# EAGLE board TeensyBalanceBoardSignalsRouted (EAGLE 7.7.0)
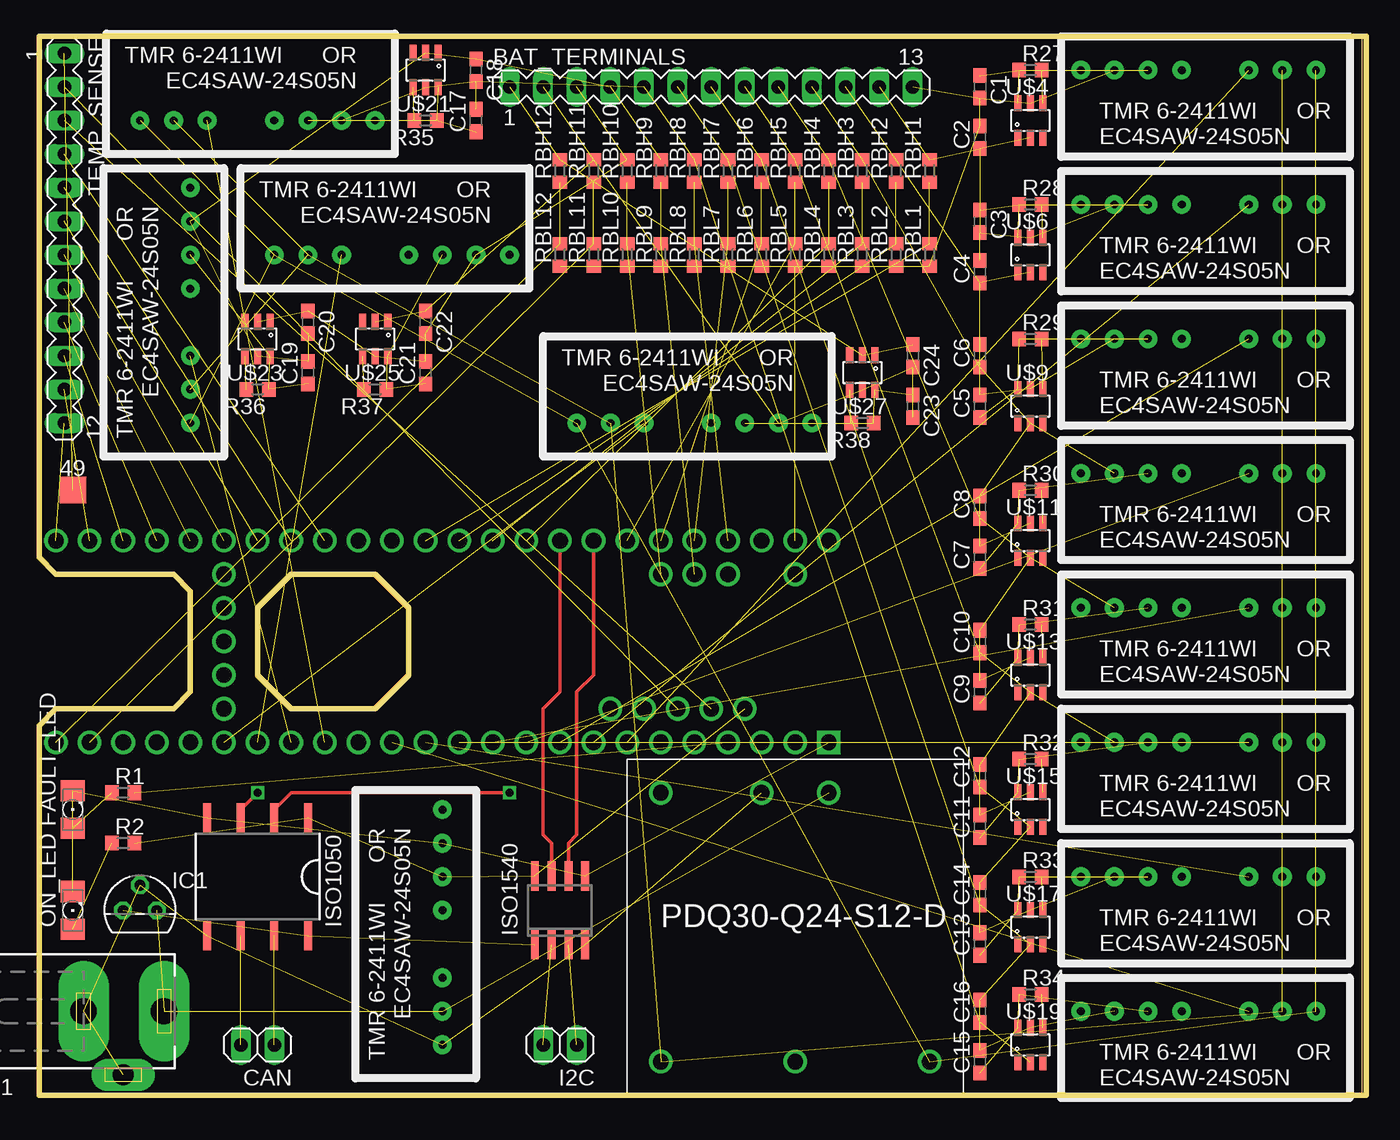
[diagram p0: board, top side]
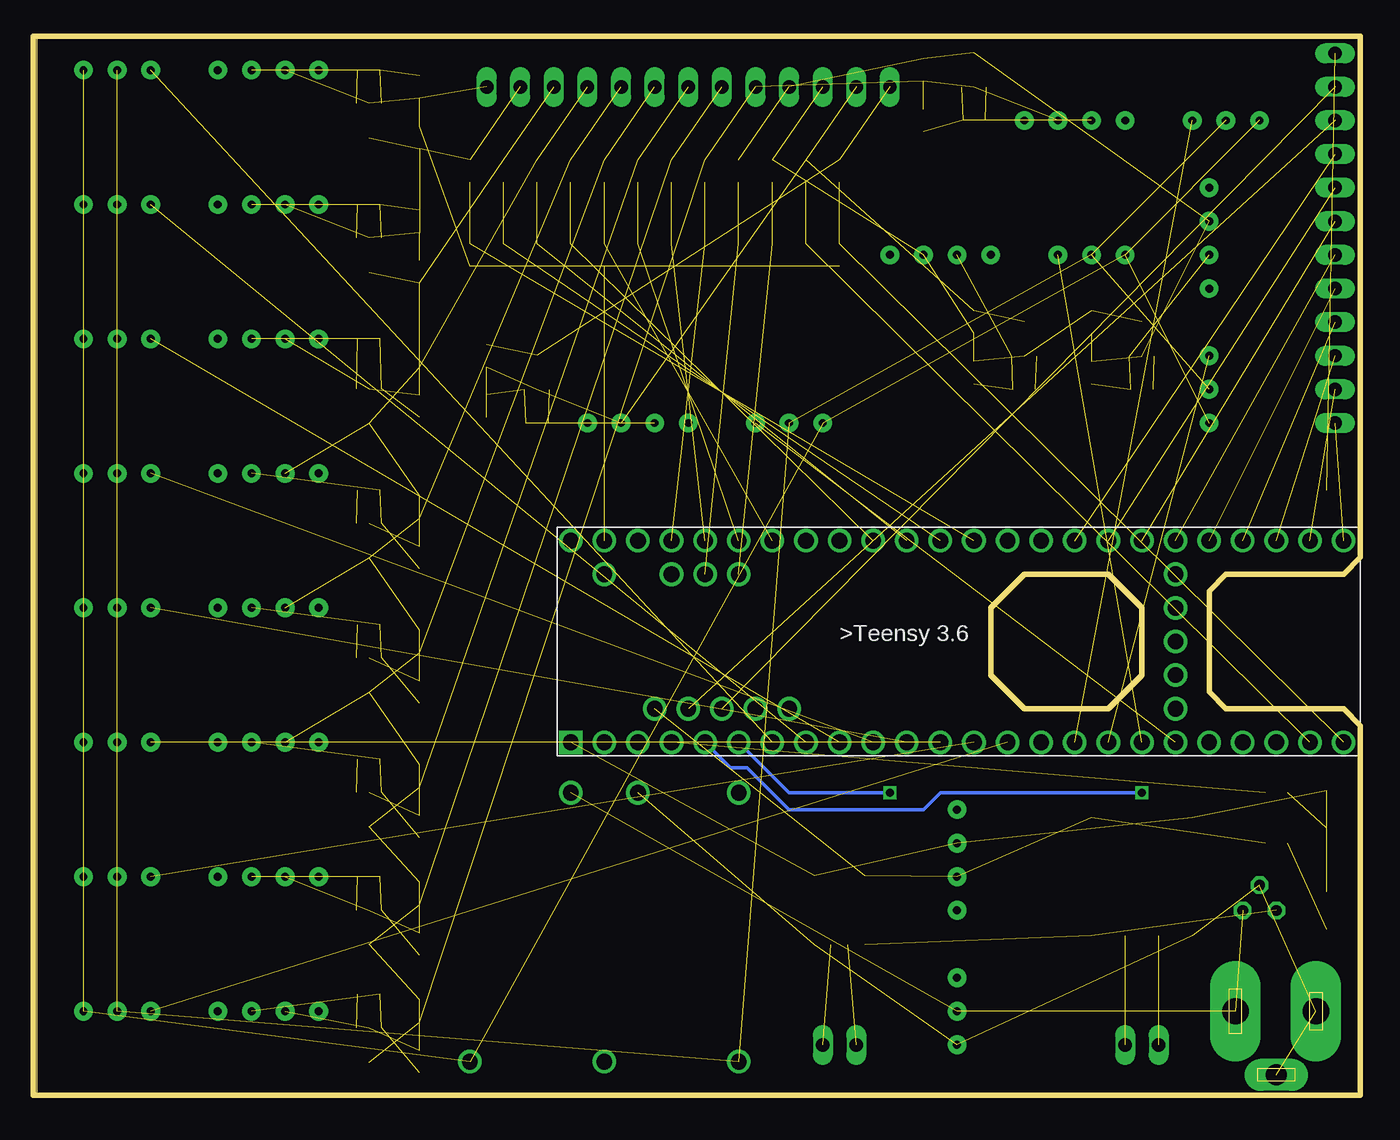
[diagram p1: board, bottom side, seen from below]

Size 100.33 x 80.01 mm. Coordinates in mm from the lower left corner, seen from the top.
Outline: 0,0 100,0 100,80 0,80 0,43.18
Outline: 0,0 0,27.94 1.27,29.21 10.16,29.21 11.43,30.48 11.43,38.1 10.16,39.37 1.27,39.37 0,40.64 0,43.18
Outline: 0,0 100.33,0 100.33,80.01 0,80.01 0,43.18
Outline: 16.51,31.75 19.05,29.21 25.4,29.21 27.94,31.75 27.94,36.83 25.4,39.37 19.05,39.37 16.51,36.83 16.51,31.75
Copper layers (1*16): Top 0.035mm / dielectric 1.5mm / Bottom 0.035mm
Design rules "default *": minimum track width 6mil, minimum drill 16mil, track to track 6mil, track to pad 6mil, pad to pad 6mil, via to via 6mil, smd to smd 6mil, copper to edge 20mil, drill to drill 6mil, minimum pad ring 10mil, minimum via ring 8mil, stop-mask expansion 4mil, vias tented up to drill 0mil, thermal gap 10mil
Net classes: 0 default: width 0.203 mm; 1 12vPower: width 0.406 mm; 2 5vPower: width 0.254 mm

## Footprints (pad centres in the part's own frame; a part is rotated, then mirrored left to right if it is on the bottom)
TP20SQ = smd 2 x 2: TP 0,0
MA13-1 = drill 1.016 long: 1 -15.24,0; 2 -12.7,0; 3 -10.16,0; 4 -7.62,0; 5 -5.08,0; 6 -2.54,0; 7 0,0; 8 2.54,0; 9 5.08,0; 10 7.62,0; 11 10.16,0; 12 12.7,0; 13 15.24,0
C0603 = smd 1.1 x 1: 1 -0.85,0; 2 0.85,0
1X02 = drill 1.016 long: 1 -1.27,0; 2 1.27,0
1206 = smd 1.6 x 1.803: A -1.422,0; C 1.422,0
TO92 = drill 0.813 octagon: 1 -1.27,0; 2 0,1.905; 3 1.27,0
DUB-R-PDSO-G8 = smd 0.6 x 2.2: 1 -3.81,-4.445; 2 -1.27,-4.445; 3 1.27,-4.445; 4 3.81,-4.445; 5 3.81,4.445; 6 1.27,4.445; 7 -1.27,4.445; 8 -3.81,4.445
SO-08 = smd 0.6 x 2.2: 1 -1.905,-2.6; 2 -0.635,-2.6; 3 0.635,-2.6; 4 1.905,-2.6; 5 1.905,2.6; 6 0.635,2.6; 7 -0.635,2.6; 8 -1.905,2.6
DCJ0303 = drill 2 pad 3.81 long: 1 0,3.1; 3 0,-3 | drill 1.6 pad 2 long: 2 4.8,0
R0603 = smd 1 x 1.1: 1 -0.85,0; 2 0.85,0
MA12-1 = drill 1.016 long: 1 -13.97,0; 2 -11.43,0; 3 -8.89,0; 4 -6.35,0; 5 -3.81,0; 6 -1.27,0; 7 1.27,0; 8 3.81,0; 9 6.35,0; 10 8.89,0; 11 11.43,0; 12 13.97,0
TEENSY3.6 = drill 1.19: 0 2.54,-15.24; 1 5.08,-15.24; 2 7.62,-15.24; 3 10.16,-15.24; 3.3V 35.56,-15.24; 3.3V(250MAMAX) 5.08,0; 4 12.7,-15.24; 5 15.24,-15.24; 5V 6.35,-12.7; 6 17.78,-15.24; 7 20.32,-15.24; 8 22.86,-15.24; 9 25.4,-15.24; 10 27.94,-15.24; 11 30.48,-15.24; 12 33.02,-15.24; 13 33.02,0; 14 30.48,0; 15 27.94,0; 16 25.4,0; 17 22.86,0; 18 20.32,0; 19 17.78,0; 20 15.24,0; 21 12.7,0; 22 10.16,0; 23 7.62,0; 24 38.1,-15.24; 25 40.64,-15.24; 26 43.18,-15.24; 27 45.72,-15.24; 28 48.26,-15.24; 29 50.8,-15.24; 30 53.34,-15.24; 31 55.88,-15.24; 32 58.42,-15.24; 33 58.42,0; 34 55.88,0; 35 53.34,0; 36 50.8,0; 37 48.26,0; 38 45.72,0; 39 43.18,0; A10 10.16,-2.54; A11 12.7,-2.54; A21 40.64,0; A22 38.1,0; ANALOG-GND 2.54,0; AREF 7.62,-2.54; DM 8.89,-12.7; DP 11.43,-12.7; GND' 35.56,0; GND'' 13.97,-12.7; GND''' 16.51,-12.7; P$30 45.72,-12.7; P$31 45.72,-10.16; P$32 45.72,-7.62; P$33 45.72,-5.08; P$34 45.72,-2.54; VIN 0,0; VUSB 2.54,-2.54 | drill 1.19 square: GND 0,-15.24
EC4SAW-24S05N = drill 0.6 pad 1.422: 1 2.54,2.54; 2 5.08,2.54; 3 7.62,2.54; 4 12.7,2.54; 5 15.24,2.54; 6 17.78,2.54; 7 20.32,2.54
SOT23-6 = smd 0.55 x 1.2: 1 -0.95,-1.3; 2 0,-1.3; 3 0.95,-1.3; 4 0.95,1.3; 5 0,1.3; 6 -0.95,1.3
PDQ30-Q24-S12-D = drill 1.19: 1 15.24,22.86; 2 10.16,22.86; 3 22.86,2.54; 4 12.7,2.54; 5 2.54,2.54; 6 2.54,22.86

## Placement (x,y rotation side)
49  TPTP20SQ  [TP20SQ]  2.54,45.72 0 top
BAT_TERMINALS  [MA13-1]  50.8,76.2 0 top
C1  2.2uF  [C0603]  71.12,76.2 270 top
C2  2.2uF  [C0603]  71.12,72.39 90 top
C3  2.2uF  [C0603]  71.12,66.04 270 top
C4  2.2uF  [C0603]  71.12,62.23 90 top
C5  2.2uF  [C0603]  71.12,52.07 90 top
C6  2.2uF  [C0603]  71.12,55.88 90 top
C7  2.2uF  [C0603]  71.12,40.64 90 top
C8  2.2uF  [C0603]  71.12,44.45 90 top
C9  2.2uF  [C0603]  71.12,30.48 90 top
C10  2.2uF  [C0603]  71.12,34.29 90 top
C11  2.2uF  [C0603]  71.12,20.32 90 top
C12  2.2uF  [C0603]  71.12,24.13 90 top
C13  2.2uF  [C0603]  71.12,11.43 90 top
C14  2.2uF  [C0603]  71.12,15.24 90 top
C15  2.2uF  [C0603]  71.12,2.54 90 top
C16  2.2uF  [C0603]  71.12,6.35 90 top
C17  2.2uF  [C0603]  33.02,73.66 90 top
C18  2.2uF  [C0603]  33.02,77.47 270 top
C19  2.2uF  [C0603]  20.32,54.61 90 top
C20  2.2uF  [C0603]  20.32,58.42 270 top
C21  2.2uF  [C0603]  29.21,54.61 90 top
C22  2.2uF  [C0603]  29.21,58.42 270 top
C23  2.2uF  [C0603]  66.04,52.07 270 top
C24  2.2uF  [C0603]  66.04,55.88 270 top
CAN  [1X02]  16.51,3.81 180 top
FAULT_LED  [1206]  2.54,21.59 90 top
I2C  [1X02]  39.37,3.81 180 top
IC1  7805L  [TO92]  7.62,13.97 0 top
ISO1050  ISO1050DUB  [DUB-R-PDSO-G8]  16.51,16.51 180 top
ISO1540  ISO7220A  [SO-08]  39.37,13.97 0 top
J1  [DCJ0303]  6.35,6.35 270 top
ON_LED  [1206]  2.54,13.97 90 top
R1  330  [R0603]  6.35,22.86 0 top
R2  470  [R0603]  6.35,19.05 0 top
R27  470  [R0603]  74.93,77.47 0 top
R28  470  [R0603]  74.93,67.31 0 top
R29  470  [R0603]  74.93,57.15 0 top
R30  470  [R0603]  74.93,45.72 0 top
R31  470  [R0603]  74.93,35.56 0 top
R32  470  [R0603]  74.93,25.4 0 top
R33  470  [R0603]  74.93,16.51 0 top
R34  470  [R0603]  74.93,7.62 0 top
R35  470  [R0603]  29.21,73.66 180 top
R36  470  [R0603]  16.51,53.34 180 top
R37  470  [R0603]  25.4,53.34 180 top
R38  470  [R0603]  62.23,50.8 180 top
RBH1  [R0603]  67.31,69.85 90 top
RBH2  [R0603]  64.77,69.85 90 top
RBH3  [R0603]  62.23,69.85 90 top
RBH4  [R0603]  59.69,69.85 90 top
RBH5  [R0603]  57.15,69.85 90 top
RBH6  [R0603]  54.61,69.85 90 top
RBH7  [R0603]  52.07,69.85 90 top
RBH8  [R0603]  49.53,69.85 90 top
RBH9  [R0603]  46.99,69.85 90 top
RBH10  [R0603]  44.45,69.85 90 top
RBH11  [R0603]  41.91,69.85 90 top
RBH12  [R0603]  39.37,69.85 90 top
RBL1  [R0603]  67.31,63.5 90 top
RBL2  [R0603]  64.77,63.5 90 top
RBL3  [R0603]  62.23,63.5 90 top
RBL4  [R0603]  59.69,63.5 90 top
RBL5  [R0603]  57.15,63.5 90 top
RBL6  [R0603]  54.61,63.5 90 top
RBL7  [R0603]  52.07,63.5 90 top
RBL8  [R0603]  49.53,63.5 90 top
RBL9  [R0603]  46.99,63.5 90 top
RBL10  [R0603]  44.45,63.5 90 top
RBL11  [R0603]  41.91,63.5 90 top
RBL12  [R0603]  39.37,63.5 90 top
TEMP_SENSE  [MA12-1]  1.91,64.77 270 top
U$1  TEENSY3.6  [TEENSY3.6]  59.69,41.91 0 bottom
U$2  EC4SAW-24S05N6-2411WI  [EC4SAW-24S05N]  99.06,80.01 180 top
U$3  EC4SAW-24S05N6-2411WI  [EC4SAW-24S05N]  33.02,1.27 90 top
U$4  10F200T  [SOT23-6]  74.93,73.66 0 top
U$5  EC4SAW-24S05N6-2411WI  [EC4SAW-24S05N]  99.06,69.85 180 top
U$6  10F200T  [SOT23-6]  74.93,63.5 0 top
U$7  EC4SAW-24S05N6-2411WI  [EC4SAW-24S05N]  99.06,59.69 180 top
U$8  PDQ30-Q24-S12-D  [PDQ30-Q24-S12-D]  44.45,0 0 top
U$9  10F200T  [SOT23-6]  74.93,52.07 0 top
U$10  EC4SAW-24S05N6-2411WI  [EC4SAW-24S05N]  99.06,49.53 180 top
U$11  10F200T  [SOT23-6]  74.93,41.91 0 top
U$12  EC4SAW-24S05N6-2411WI  [EC4SAW-24S05N]  99.06,39.37 180 top
U$13  10F200T  [SOT23-6]  74.93,31.75 0 top
U$14  EC4SAW-24S05N6-2411WI  [EC4SAW-24S05N]  99.06,29.21 180 top
U$15  10F200T  [SOT23-6]  74.93,21.59 0 top
U$16  EC4SAW-24S05N6-2411WI  [EC4SAW-24S05N]  99.06,19.05 180 top
U$17  10F200T  [SOT23-6]  74.93,12.7 0 top
U$18  EC4SAW-24S05N6-2411WI  [EC4SAW-24S05N]  99.06,8.89 180 top
U$19  10F200T  [SOT23-6]  74.93,3.81 0 top
U$20  EC4SAW-24S05N6-2411WI  [EC4SAW-24S05N]  5.08,71.12 0 top
U$21  10F200T  [SOT23-6]  29.21,77.47 180 top
U$22  EC4SAW-24S05N6-2411WI  [EC4SAW-24S05N]  13.97,48.26 90 top
U$23  10F200T  [SOT23-6]  16.51,57.15 180 top
U$24  EC4SAW-24S05N6-2411WI  [EC4SAW-24S05N]  15.24,60.96 0 top
U$25  10F200T  [SOT23-6]  25.4,57.15 180 top
U$26  EC4SAW-24S05N6-2411WI  [EC4SAW-24S05N]  38.1,48.26 0 top
U$27  10F200T  [SOT23-6]  62.23,54.61 180 top

## Library data of the parts
49 = testpad
BAT_TERMINALS TEMP_SENSE = con-lstb; OC_FARNELL: unknown; OC_NEWARK: unknown
C1-C24 U$4 U$6 U$9 U$11 U$13 U$15 U$17 U$19 U$21 U$23 U$25 U$27 = adafruit
CAN I2C = pinhead
FAULT_LED ON_LED = led
IC1 = linear
ISO1050 = texas; MPN: ISO1050DUBR; OC_FARNELL: 1755712; OC_NEWARK: 14R9899
ISO1540 = texas; MPN: ISO7220AD; OC_FARNELL: 1390649; OC_NEWARK: 48M0666
J1 = con-jack; OC_FARNELL: unknown; OC_NEWARK: unknown
R1 R2 R27-R38 RBH1-RBH12 RBL1-RBL12 = eagle-ltspice; SPICEMODEL: NONE; SPICEPREFIX: R
U$1-U$3 U$5 U$7 U$8 U$10 U$12 U$14 U$16 U$18 U$20 U$22 U$24 U$26 = Teensy36

## Nets
5V [5vPower]: ISO1050.1 ISO1540.8 R2.2 U$1.5V U$3.5
AGND [5vPower]: BAT_TERMINALS.13 C1.2 C2.2 RBL1.1 RBL2.1 RBL3.1 RBL4.1 RBL5.1 RBL6.1 RBL7.1 RBL8.1 RBL9.1 RBL10.1 RBL11.1 RBL12.1 U$1.ANALOG-GND U$2.6 U$4.5
B1 [5vPower]: BAT_TERMINALS.12 C2.1 C3.2 C4.2 RBH1.2 U$4.2 U$5.6 U$6.5
B2 [5vPower]: BAT_TERMINALS.11 C4.1 C5.2 C6.2 RBH2.2 U$6.2 U$7.6 U$9.5
B3 [5vPower]: BAT_TERMINALS.10 C6.1 C7.2 C8.2 RBH3.2 U$9.2 U$10.6 U$11.5
B4 [5vPower]: BAT_TERMINALS.9 C8.1 C9.2 C10.2 RBH4.2 U$11.2 U$12.6 U$13.5
B5 [5vPower]: BAT_TERMINALS.8 C10.1 C11.2 C12.2 RBH5.2 U$13.2 U$14.6 U$15.5
B6 [5vPower]: BAT_TERMINALS.7 C12.1 C13.2 C14.2 RBH6.2 U$15.2 U$16.6 U$17.5
B7 [5vPower]: BAT_TERMINALS.6 C14.1 C15.2 C16.2 RBH7.2 U$17.2 U$18.6 U$19.5
B8 [5vPower]: BAT_TERMINALS.5 C16.1 C17.2 C18.2 RBH8.2 U$19.2 U$20.6 U$21.5
B9 [5vPower]: BAT_TERMINALS.4 C18.1 C19.2 C20.2 RBH9.2 U$21.2 U$22.6 U$23.5
B10 [5vPower]: BAT_TERMINALS.3 C20.1 C21.2 C22.2 RBH10.2 U$23.2 U$24.6 U$25.5
B11 [5vPower]: BAT_TERMINALS.2 C22.1 C23.2 C24.2 RBH11.2 U$25.2 U$26.6 U$27.5
B12 [5vPower]: BAT_TERMINALS.1 C24.1 RBH12.2 U$27.2
C1: U$1.5 U$2.3
C2: U$1.6 U$5.3
C3: U$1.7 U$7.3
C4: U$1.8 U$10.3
C5: U$1.9 U$12.3
C6: U$1.10 U$14.3
C7: U$1.11 U$16.3
C8: U$1.12 U$18.3
C9: U$1.24 U$20.3
C10: U$1.25 U$22.3
C11: U$1.26 U$24.3
C12: U$1.27 U$26.3
CAN_HIGH: CAN.1 ISO1050.7
CAN_LOW: CAN.2 ISO1050.6
CHARGE+ [12vPower]: U$2.1 U$5.1 U$7.1 U$8.3 U$10.1 U$12.1 U$14.1 U$16.1 U$18.1 U$20.1 U$22.1 U$24.1 U$26.1
CHARGE- [12vPower]: U$2.2 U$5.2 U$7.2 U$8.5 U$10.2 U$12.2 U$14.2 U$16.2 U$18.2 U$20.2 U$22.2 U$24.2 U$26.2
FAULT: R1.2 U$1.2
GLV_5V: IC1.1 ISO1050.8 ISO1540.1
GLV_12V [12vPower]: IC1.3 J1.1 U$3.2 U$8.1
GLV_GND [12vPower]: IC1.2 ISO1050.5 ISO1540.4 J1.2 J1.3 U$3.1 U$8.2
GND [12vPower]: FAULT_LED.C ISO1050.4 ISO1540.5 ON_LED.C U$1.GND U$3.6
N$1 [5vPower]: C1.1 R27.1 U$2.5 U$4.6
N$2: U$1.3.3V(250MAMAX)
N$3: ISO1050.3 U$1.3
N$4: ISO1050.2 U$1.4
N$5 [5vPower]: C3.1 R28.1 U$5.5 U$6.6
N$6: ON_LED.A R2.1
N$7: FAULT_LED.A R1.1
N$8: R27.2 U$4.4
N$9: R28.2 U$6.4
N$10 [5vPower]: C5.1 R29.1 U$7.5 U$9.6
N$11: R29.2 U$9.4
N$12 [5vPower]: C7.1 R30.1 U$10.5 U$11.6
N$13: R30.2 U$11.4
N$14 [5vPower]: C9.1 R31.1 U$12.5 U$13.6
N$15: R31.2 U$13.4
N$16 [5vPower]: C11.1 R32.1 U$14.5 U$15.6
N$17: R32.2 U$15.4
N$18 [5vPower]: C13.1 R33.1 U$16.5 U$17.6
N$19: R33.2 U$17.4
N$20 [5vPower]: C15.1 R34.1 U$18.5 U$19.6
N$21: R34.2 U$19.4
N$22 [5vPower]: C17.1 R35.1 U$20.5 U$21.6
N$23: R35.2 U$21.4
N$24 [5vPower]: C19.1 R36.1 U$22.5 U$23.6
N$25: R36.2 U$23.4
N$26 [5vPower]: C21.1 R37.1 U$24.5 U$25.6
N$27: R37.2 U$25.4
N$28 [5vPower]: C23.1 R38.1 U$26.5 U$27.6
N$29: R38.2 U$27.4
SCL: ISO1540.6 U$1.19
SCL_GLV: I2C.1 ISO1540.3
SDA: ISO1540.7 U$1.18
SDA_GLV: I2C.2 ISO1540.2
TS1: TEMP_SENSE.12 U$1.33
TS2: TEMP_SENSE.11 U$1.34
TS3: TEMP_SENSE.10 U$1.35
TS4: TEMP_SENSE.9 U$1.36
TS5: TEMP_SENSE.8 U$1.37
TS6: TEMP_SENSE.7 U$1.38
TS7: TEMP_SENSE.6 U$1.39
TS8: TEMP_SENSE.5 U$1.A21
TS9: TEMP_SENSE.4 U$1.A22
TS10: TEMP_SENSE.3 U$1.DM
TS11: TEMP_SENSE.2 U$1.DP
TS12: 49.TP TEMP_SENSE.1
VS1: RBH1.1 RBL1.2 U$1.14
VS2: RBH2.1 RBL2.2 U$1.15
VS3: RBH3.1 RBL3.2 U$1.16
VS4: RBH4.1 RBL4.2 U$1.17
VS5: RBH5.1 RBL5.2 U$1.20
VS6: RBH6.1 RBL6.2 U$1.21
VS7: RBH7.1 RBL7.2 U$1.22
VS8: RBH8.1 RBL8.2 U$1.23
VS9: RBH9.1 RBL9.2 U$1.A10
VS10: RBH10.1 RBL10.2 U$1.A11
VS11: RBH11.1 RBL11.2 U$1.31
VS12: RBH12.1 RBL12.2 U$1.32

## Tracks (layer width: path | path; a pad name or v marks a point on that pad's centre or on a via)
5V  (4 unrouted)
AGND  (17 unrouted)
B1  (7 unrouted)
B2  (7 unrouted)
B3  (7 unrouted)
B4  (7 unrouted)
B5  (7 unrouted)
B6  (7 unrouted)
B7  (7 unrouted)
B8  (7 unrouted)
B9  (7 unrouted)
B10  (7 unrouted)
B11  (7 unrouted)
B12  (3 unrouted)
C1  (1 unrouted)
C2  (1 unrouted)
C3  (1 unrouted)
C4  (1 unrouted)
C5  (1 unrouted)
C6  (1 unrouted)
C7  (1 unrouted)
C8  (1 unrouted)
C9  (1 unrouted)
C10  (1 unrouted)
C11  (1 unrouted)
C12  (1 unrouted)
CAN_HIGH  (1 unrouted)
CAN_LOW  (1 unrouted)
CHARGE+  (12 unrouted)
CHARGE-  (12 unrouted)
FAULT  (1 unrouted)
GLV_5V  (2 unrouted)
GLV_12V  (3 unrouted)
GLV_GND  (6 unrouted)
GND  (5 unrouted)
N$1  (3 unrouted)
N$3  (via drill 0.6)
  Top 0.254: ISO1050.3 15.24,21.59 v16.51,22.86
  Bottom 0.254: v16.51,22.86 31.75,22.86 33.02,21.59 43.18,21.59 46.35,24.77 47.62,24.77 U$1.3
N$4  (via drill 0.6)
  Top 0.254: ISO1050.2 17.78,21.59 19.05,22.86 v35.56,22.86
  Bottom 0.254: v35.56,22.86 43.18,22.86 U$1.4
N$5  (3 unrouted)
N$6  (1 unrouted)
N$7  (1 unrouted)
N$8  (1 unrouted)
N$9  (1 unrouted)
N$10  (3 unrouted)
N$11  (1 unrouted)
N$12  (3 unrouted)
N$13  (1 unrouted)
N$14  (3 unrouted)
N$15  (1 unrouted)
N$16  (3 unrouted)
N$17  (1 unrouted)
N$18  (3 unrouted)
N$19  (1 unrouted)
N$20  (3 unrouted)
N$21  (1 unrouted)
N$22  (3 unrouted)
N$23  (1 unrouted)
N$24  (3 unrouted)
N$25  (1 unrouted)
N$26  (3 unrouted)
N$27  (1 unrouted)
N$28  (3 unrouted)
N$29  (1 unrouted)
SCL
  Top 0.254: U$1.19 41.91,31.75 40.64,30.48 40.64,19.68 40.01,19.05 ISO1540.6
SCL_GLV  (1 unrouted)
SDA
  Top 0.254: U$1.18 39.37,30.48 38.1,29.21 38.1,19.68 38.73,19.05 ISO1540.7
SDA_GLV  (1 unrouted)
TS1  (1 unrouted)
TS2  (1 unrouted)
TS3  (1 unrouted)
TS4  (1 unrouted)
TS5  (1 unrouted)
TS6  (1 unrouted)
TS7  (1 unrouted)
TS8  (1 unrouted)
TS9  (1 unrouted)
TS10  (1 unrouted)
TS11  (1 unrouted)
TS12  (1 unrouted)
VS1  (2 unrouted)
VS2  (2 unrouted)
VS3  (2 unrouted)
VS4  (2 unrouted)
VS5  (2 unrouted)
VS6  (2 unrouted)
VS7  (2 unrouted)
VS8  (2 unrouted)
VS9  (2 unrouted)
VS10  (2 unrouted)
VS11  (2 unrouted)
VS12  (2 unrouted)